# EAGLE board registers_half_layout (EAGLE 9.5.2), part 1 of 2
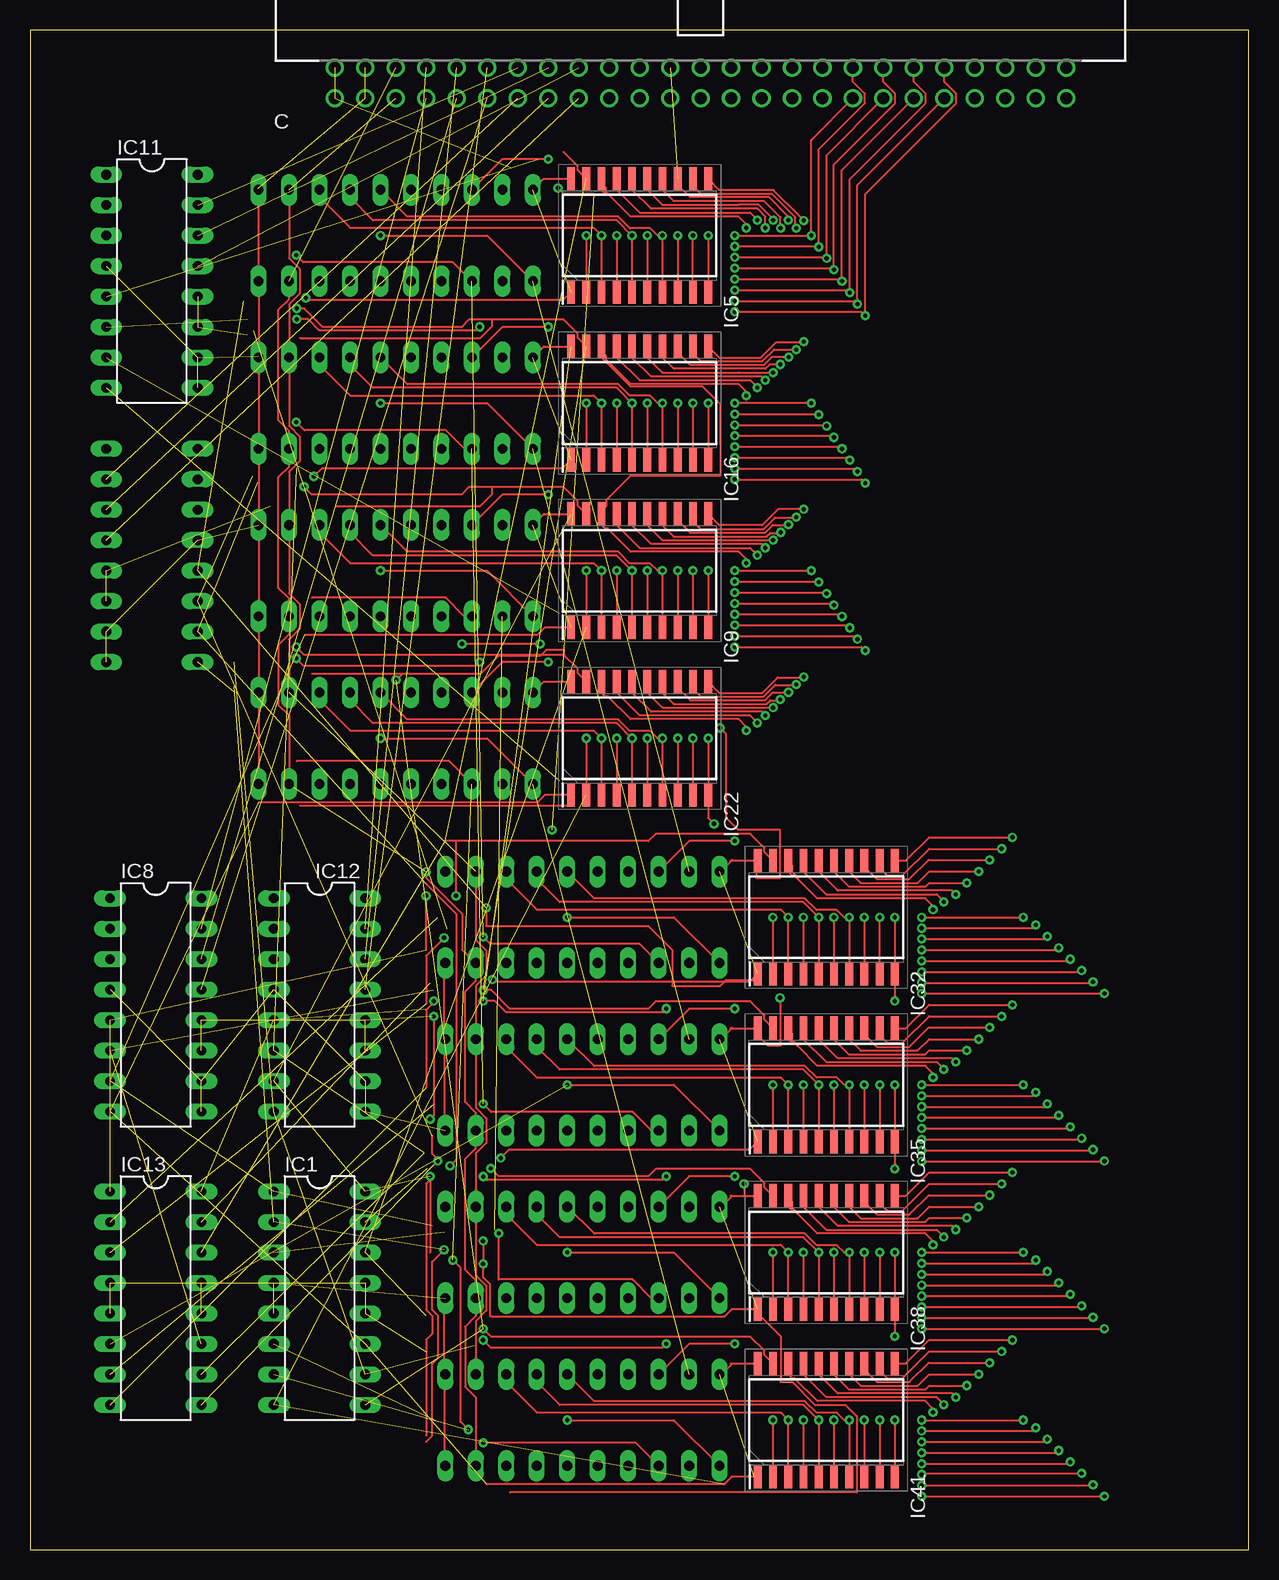
[diagram p0: board, top side]
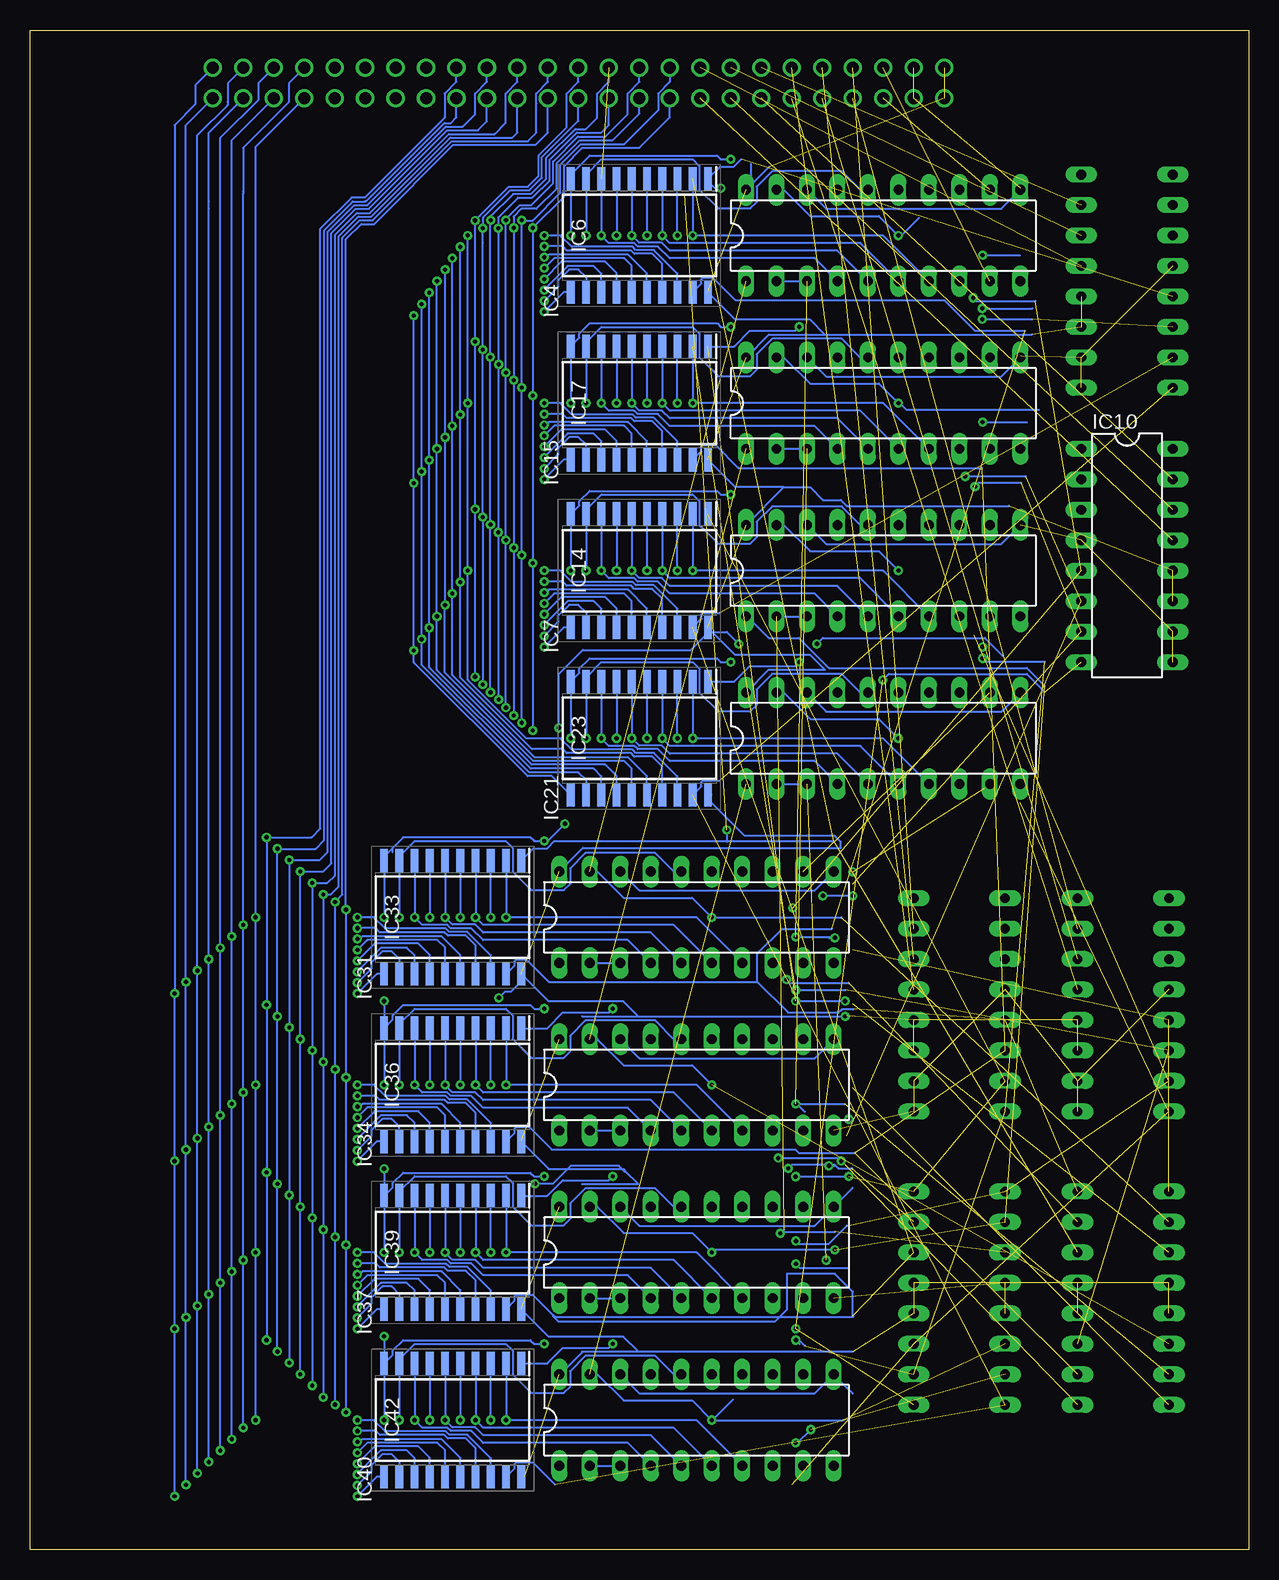
[diagram p1: board, bottom side, seen from below]

Size 101.58 x 126.67 mm. Coordinates in mm from the lower left corner, seen from the top.
Outline: 0,0 101.58,0 101.58,126.67 0,126.67 0,0
Copper layers (1*16): Top 0.035mm / dielectric 1.5mm / Bottom 0.035mm
Design rules "default *": minimum track width 6mil, minimum drill 0.35mm, track to track 6mil, track to pad 6mil, pad to pad 6mil, via to via 6mil, smd to smd 6mil, copper to edge 40mil, drill to drill 6mil, minimum pad ring 10mil, minimum via ring 8mil, stop-mask expansion 4mil, vias tented up to drill 0mil, thermal gap 10mil

## Footprints (pad centres in the part's own frame; a part is rotated, then mirrored left to right if it is on the bottom)
PAK100/2500-5-50 = drill 1 pad 1.422: 1 -30.48,-1.27; 2 -30.48,1.27; 3 -27.94,-1.27; 4 -27.94,1.27; 5 -25.4,-1.27; 6 -25.4,1.27; 7 -22.86,-1.27; 8 -22.86,1.27; 9 -20.32,-1.27; 10 -20.32,1.27; 11 -17.78,-1.27; 12 -17.78,1.27; 13 -15.24,-1.27; 14 -15.24,1.27; 15 -12.7,-1.27; 16 -12.7,1.27; 17 -10.16,-1.27; 18 -10.16,1.27; 19 -7.62,-1.27; 20 -7.62,1.27; 21 -5.08,-1.27; 22 -5.08,1.27; 23 -2.54,-1.27; 24 -2.54,1.27; 25 0,-1.27; 26 0,1.27; 27 2.54,-1.27; 28 2.54,1.27; 29 5.08,-1.27; 30 5.08,1.27; 31 7.62,-1.27; 32 7.62,1.27; 33 10.16,-1.27; 34 10.16,1.27; 35 12.7,-1.27; 36 12.7,1.27; 37 15.24,-1.27; 38 15.24,1.27; 39 17.78,-1.27; 40 17.78,1.27; 41 20.32,-1.27; 42 20.32,1.27; 43 22.86,-1.27; 44 22.86,1.27; 45 25.4,-1.27; 46 25.4,1.27; 47 27.94,-1.27; 48 27.94,1.27; 49 30.48,-1.27; 50 30.48,1.27
DIL16 = drill 0.813 long: 1 -8.89,-3.81; 2 -6.35,-3.81; 3 -3.81,-3.81; 4 -1.27,-3.81; 5 1.27,-3.81; 6 3.81,-3.81; 7 6.35,-3.81; 8 8.89,-3.81; 9 8.89,3.81; 10 6.35,3.81; 11 3.81,3.81; 12 1.27,3.81; 13 -1.27,3.81; 14 -3.81,3.81; 15 -6.35,3.81; 16 -8.89,3.81
DIL20 = drill 0.813 long: 1 -11.43,-3.81; 2 -8.89,-3.81; 3 -6.35,-3.81; 4 -3.81,-3.81; 5 -1.27,-3.81; 6 1.27,-3.81; 7 3.81,-3.81; 8 6.35,-3.81; 9 8.89,-3.81; 10 11.43,-3.81; 11 11.43,3.81; 12 8.89,3.81; 13 6.35,3.81; 14 3.81,3.81; 15 1.27,3.81; 16 -1.27,3.81; 17 -3.81,3.81; 18 -6.35,3.81; 19 -8.89,3.81; 20 -11.43,3.81
SOIC127P1030X265-20N = smd 1.95 x 0.65: 1 -4.725,5.715; 2 -4.725,4.445; 3 -4.725,3.175; 4 -4.725,1.905; 5 -4.725,0.635; 6 -4.725,-0.635; 7 -4.725,-1.905; 8 -4.725,-3.175; 9 -4.725,-4.445; 10 -4.725,-5.715; 11 4.725,-5.715; 12 4.725,-4.445; 13 4.725,-3.175; 14 4.725,-1.905; 15 4.725,-0.635; 16 4.725,0.635; 17 4.725,1.905; 18 4.725,3.175; 19 4.725,4.445; 20 4.725,5.715

## Placement (x,y rotation side)
C  2550-5  [PAK100/2500-5-50]  55.88,122.24 0 top
IC1  74AC11032  [DIL16]  24.13,20.95 270 top
IC4  74HCT299N  [DIL20]  30.48,109.54 0 bottom
IC5  SN74CBT3345DW  [SOIC127P1030X265-20N]  50.8,109.54 90 top
IC6  SN74CBT3345DW  [SOIC127P1030X265-20N]  50.8,109.54 270 bottom
IC7  74HCT299N  [DIL20]  30.48,81.6 0 bottom
IC8  74AC11138  [DIL16]  10.48,45.4 270 top
IC9  SN74CBT3345DW  [SOIC127P1030X265-20N]  50.8,81.6 90 top
IC10  74AC11238  [DIL16]  10.16,82.87 270 bottom
IC11  74AC11238  [DIL16]  10.16,105.73 270 top
IC12  74AC11138  [DIL16]  24.13,45.4 270 top
IC13  74AC11032  [DIL16]  10.48,20.95 270 top
IC14  SN74CBT3345DW  [SOIC127P1030X265-20N]  50.8,81.6 270 bottom
IC15  74HCT299N  [DIL20]  30.48,95.57 0 bottom
IC16  SN74CBT3345DW  [SOIC127P1030X265-20N]  50.8,95.57 90 top
IC17  SN74CBT3345DW  [SOIC127P1030X265-20N]  50.8,95.57 270 bottom
IC21  74HCT299N  [DIL20]  30.48,67.63 0 bottom
IC22  SN74CBT3345DW  [SOIC127P1030X265-20N]  50.8,67.63 90 top
IC23  SN74CBT3345DW  [SOIC127P1030X265-20N]  50.8,67.63 270 bottom
IC31  74HCT299N  [DIL20]  46.04,52.7 0 bottom
IC32  SN74CBT3345DW  [SOIC127P1030X265-20N]  66.36,52.7 90 top
IC33  SN74CBT3345DW  [SOIC127P1030X265-20N]  66.36,52.7 270 bottom
IC34  74HCT299N  [DIL20]  46.04,38.73 0 bottom
IC35  SN74CBT3345DW  [SOIC127P1030X265-20N]  66.36,38.73 90 top
IC36  SN74CBT3345DW  [SOIC127P1030X265-20N]  66.36,38.73 270 bottom
IC37  74HCT299N  [DIL20]  46.04,24.77 0 bottom
IC38  SN74CBT3345DW  [SOIC127P1030X265-20N]  66.36,24.77 90 top
IC39  SN74CBT3345DW  [SOIC127P1030X265-20N]  66.36,24.77 270 bottom
IC40  74HCT299N  [DIL20]  46.04,10.79 0 bottom
IC41  SN74CBT3345DW  [SOIC127P1030X265-20N]  66.36,10.79 90 top
IC42  SN74CBT3345DW  [SOIC127P1030X265-20N]  66.36,10.79 270 bottom

## Library data of the parts
C = con-3m; OC_FARNELL: 1788696; OC_NEWARK: unknown
IC1 IC8 IC10-IC13 = 74ac-logic
IC4 IC7 IC15 IC21 IC31 IC34 IC37 IC40 = 74xx-eu
IC5 IC6 IC9 IC14 IC16 IC17 IC22 IC23 IC32 IC33 IC35 IC36 IC38 IC39 IC41 IC42 = SamacSys_Parts; DESCRIPTION: Texas Instruments SN74CBT3345DW, Bus Switch, 8 x 1:1, 4.5 5.5 V, 20-Pin SOIC; HEIGHT: 2.65mm; MANUFACTURER_NAME: Texas Instruments; MANUFACTURER_PART_NUMBER: SN74CBT3345DW

## Nets
BUSA_BIT0: C.19 IC5.18 IC9.18 IC16.18 IC22.18
BUSA_BIT1: C.20 IC5.17 IC9.17 IC16.17 IC22.17
BUSA_BIT2: C.21 IC5.16 IC9.16 IC16.16 IC22.16
BUSA_BIT3: C.22 IC5.15 IC9.15 IC16.15 IC22.15
BUSA_BIT4: C.23 IC5.14 IC9.14 IC16.14 IC22.14
BUSA_BIT5: C.24 IC5.13 IC9.13 IC16.13 IC22.13
BUSA_BIT6: C.25 IC5.12 IC9.12 IC16.12 IC22.12
BUSA_BIT7: C.26 IC5.11 IC9.11 IC16.11 IC22.11
BUSA_BIT8: C.27 IC32.18 IC35.18 IC38.18 IC41.18
BUSA_BIT9: C.28 IC32.17 IC35.17 IC38.17 IC41.17
BUSA_BIT10: C.29 IC32.16 IC35.16 IC38.16 IC41.16
BUSA_BIT11: C.30 IC32.15 IC35.15 IC38.15 IC41.15
BUSA_BIT12: C.31 IC32.14 IC35.14 IC38.14 IC41.14
BUSA_BIT13: C.32 IC32.13 IC35.13 IC38.13 IC41.13
BUSA_BIT14: C.33 IC32.12 IC35.12 IC38.12 IC41.12
BUSA_BIT15: C.34 IC32.11 IC35.11 IC38.11 IC41.11
BUSA_REGIN0: C.7 IC8.15
BUSA_REGIN1: C.9 IC8.14
BUSA_REGIN2: C.11 IC8.13
BUSA_REGOUT0: C.13 IC10.15
BUSA_REGOUT1: C.15 IC10.14
BUSA_REGOUT2: C.17 IC10.13
BUSB_BIT0: C.35 IC6.18 IC14.18 IC17.18 IC23.18
BUSB_BIT1: C.36 IC6.17 IC14.17 IC17.17 IC23.17
BUSB_BIT2: C.37 IC6.16 IC14.16 IC17.16 IC23.16
BUSB_BIT3: C.38 IC6.15 IC14.15 IC17.15 IC23.15
BUSB_BIT4: C.39 IC6.14 IC14.14 IC17.14 IC23.14
BUSB_BIT5: C.40 IC6.13 IC14.13 IC17.13 IC23.13
BUSB_BIT6: C.41 IC6.12 IC14.12 IC17.12 IC23.12
BUSB_BIT7: C.42 IC6.11 IC14.11 IC17.11 IC23.11
BUSB_BIT8: C.43 IC33.18 IC36.18 IC39.18 IC42.18
BUSB_BIT9: C.44 IC33.17 IC36.17 IC39.17 IC42.17
BUSB_BIT10: C.45 IC33.16 IC36.16 IC39.16 IC42.16
BUSB_BIT11: C.46 IC33.15 IC36.15 IC39.15 IC42.15
BUSB_BIT12: C.47 IC33.14 IC36.14 IC39.14 IC42.14
BUSB_BIT13: C.48 IC33.13 IC36.13 IC39.13 IC42.13
BUSB_BIT14: C.49 IC33.12 IC36.12 IC39.12 IC42.12
BUSB_BIT15: C.50 IC33.11 IC36.11 IC39.11 IC42.11
BUSB_REGIN0: C.8 IC12.15
BUSB_REGIN1: C.10 IC12.14
BUSB_REGIN2: C.12 IC12.13
BUSB_REGOUT0: C.14 IC11.15
BUSB_REGOUT1: C.16 IC11.14
BUSB_REGOUT2: C.18 IC11.13
CLK: C.5 IC4.12 IC7.12 IC15.12 IC21.12 IC31.12 IC34.12 IC37.12 IC40.12
GND: C.3 C.4 IC1.4 IC1.5 IC4.10 IC4.11 IC4.18 IC5.10 IC6.10 IC7.10 IC7.11 IC7.18 IC8.4 IC8.9 IC8.10 IC9.10 IC10.4 IC10.9 IC10.10 IC11.4 IC11.9 IC11.10 IC12.4 IC12.9 IC12.10 IC13.4 IC13.5 IC14.10 IC15.10 IC15.11 IC15.18 IC16.10 IC17.10 IC21.10 IC21.11 IC21.18 IC22.10 IC23.10 IC31.10 IC31.11 IC31.18 IC32.10 IC33.10 IC34.10 IC34.11 IC34.18 IC35.10 IC36.10 IC37.10 IC37.11 IC37.18 IC38.10 IC39.10 IC40.10 IC40.11 IC40.18 IC41.10 IC42.10
N$1: IC5.19 IC8.5 IC13.1 IC32.19
N$5: IC4.7 IC5.2 IC6.2
N$6: IC4.13 IC5.3 IC6.3
N$7: IC4.6 IC5.4 IC6.4
N$8: IC4.14 IC5.5 IC6.5
N$9: IC4.5 IC5.6 IC6.6
N$10: IC4.15 IC5.7 IC6.7
N$11: IC4.4 IC5.8 IC6.8
N$15: IC4.16 IC5.9 IC6.9
N$22: IC7.7 IC9.2 IC14.2
N$23: IC7.13 IC9.3 IC14.3
N$24: IC7.6 IC9.4 IC14.4
N$25: IC7.14 IC9.5 IC14.5
N$28: IC7.5 IC9.6 IC14.6
N$34: IC5.1 IC10.5 IC13.15 IC32.1
N$35: IC7.15 IC9.7 IC14.7
N$36: IC7.4 IC9.8 IC14.8
N$37: IC7.16 IC9.9 IC14.9
N$41: IC15.7 IC16.2 IC17.2
N$42: IC15.13 IC16.3 IC17.3
N$43: IC15.6 IC16.4 IC17.4
N$44: IC15.14 IC16.5 IC17.5
N$45: IC15.5 IC16.6 IC17.6
N$46: IC15.15 IC16.7 IC17.7
N$47: IC15.4 IC16.8 IC17.8
N$48: IC15.16 IC16.9 IC17.9
N$63: IC21.7 IC22.2 IC23.2
N$64: IC21.13 IC22.3 IC23.3
N$65: IC21.6 IC22.4 IC23.4
N$66: IC21.14 IC22.5 IC23.5
N$67: IC21.5 IC22.6 IC23.6
N$68: IC21.15 IC22.7 IC23.7
N$69: IC21.4 IC22.8 IC23.8
N$70: IC21.16 IC22.9 IC23.9
N$123: IC6.1 IC11.5 IC13.14 IC33.1
N$124: IC6.19 IC12.5 IC13.16 IC33.19
N$127: IC4.2 IC4.3 IC13.3 IC31.2 IC31.3
N$128: IC4.1 IC4.19 IC13.2 IC31.1 IC31.19
N$129: IC31.7 IC32.2 IC33.2
N$130: IC31.13 IC32.3 IC33.3
N$131: IC31.6 IC32.4 IC33.4
N$132: IC31.14 IC32.5 IC33.5
N$133: IC31.5 IC32.6 IC33.6
N$134: IC31.15 IC32.7 IC33.7
N$135: IC31.4 IC32.8 IC33.8
N$136: IC31.16 IC32.9 IC33.9
N$137: IC13.7 IC15.2 IC15.3 IC34.2 IC34.3
N$138: IC13.6 IC15.1 IC15.19 IC34.1 IC34.19
N$139: IC34.7 IC35.2 IC36.2
N$140: IC34.13 IC35.3 IC36.3
N$141: IC34.6 IC35.4 IC36.4
N$142: IC34.14 IC35.5 IC36.5
N$143: IC34.5 IC35.6 IC36.6
N$144: IC34.15 IC35.7 IC36.7
N$145: IC34.4 IC35.8 IC36.8
N$146: IC34.16 IC35.9 IC36.9
N$147: IC1.3 IC7.2 IC7.3 IC37.2 IC37.3
N$148: IC1.2 IC7.1 IC7.19 IC37.1 IC37.19
N$149: IC37.7 IC38.2 IC39.2
N$150: IC37.13 IC38.3 IC39.3
N$151: IC37.6 IC38.4 IC39.4
N$152: IC37.14 IC38.5 IC39.5
N$153: IC37.5 IC38.6 IC39.6
N$154: IC37.15 IC38.7 IC39.7
N$155: IC37.4 IC38.8 IC39.8
N$156: IC37.16 IC38.9 IC39.9
N$157: IC1.7 IC21.2 IC21.3 IC40.2 IC40.3
N$158: IC1.6 IC21.1 IC21.19 IC40.1 IC40.19
N$159: IC40.7 IC41.2 IC42.2
N$160: IC40.13 IC41.3 IC42.3
N$161: IC40.6 IC41.4 IC42.4
N$162: IC40.14 IC41.5 IC42.5
N$163: IC40.5 IC41.6 IC42.6
N$164: IC40.15 IC41.7 IC42.7
N$165: IC40.4 IC41.8 IC42.8
N$166: IC40.16 IC41.9 IC42.9
N$167: IC8.6 IC13.11 IC16.19 IC35.19
N$168: IC12.6 IC13.10 IC17.19 IC36.19
N$169: IC10.6 IC13.9 IC16.1 IC35.1
N$170: IC11.6 IC13.8 IC17.1 IC36.1
N$171: IC1.1 IC8.7 IC9.1 IC38.1
N$172: IC1.16 IC12.7 IC14.1 IC39.1
N$173: IC1.15 IC9.19 IC10.7 IC38.19
N$174: IC1.14 IC11.7 IC14.19 IC39.19
N$175: IC1.11 IC8.8 IC22.1 IC41.1
N$176: IC1.9 IC10.8 IC22.19 IC41.19
N$177: IC1.8 IC11.8 IC23.19 IC42.19
N$178: IC1.10 IC12.8 IC23.1 IC42.1
STARTUP: C.6 IC4.9 IC7.9 IC15.9 IC21.9 IC31.9 IC34.9 IC37.9 IC40.9
VCC: C.1 C.2 IC1.12 IC1.13 IC4.20 IC5.20 IC6.20 IC7.20 IC8.11 IC8.12 IC9.20 IC10.11 IC10.12 IC11.11 IC11.12 IC12.11 IC12.12 IC13.12 IC13.13 IC14.20 IC15.20 IC16.20 IC17.20 IC21.20 IC22.20 IC23.20 IC31.20 IC32.20 IC33.20 IC34.20 IC35.20 IC36.20 IC37.20 IC38.20 IC39.20 IC40.20 IC41.20 IC42.20